# Altium PCB DryBox.PcbDoc
Units mm, origin at the board's own origin, x right, y up, seen from the top; angles counter-clockwise.
Board outline 48.4 x 55.54 mm, 2 copper layers (Top Layer, Bottom Layer); 57 components, 30 nets, 186 pads, 40 vias.
Unrouted connection lines stored in the file: 10.
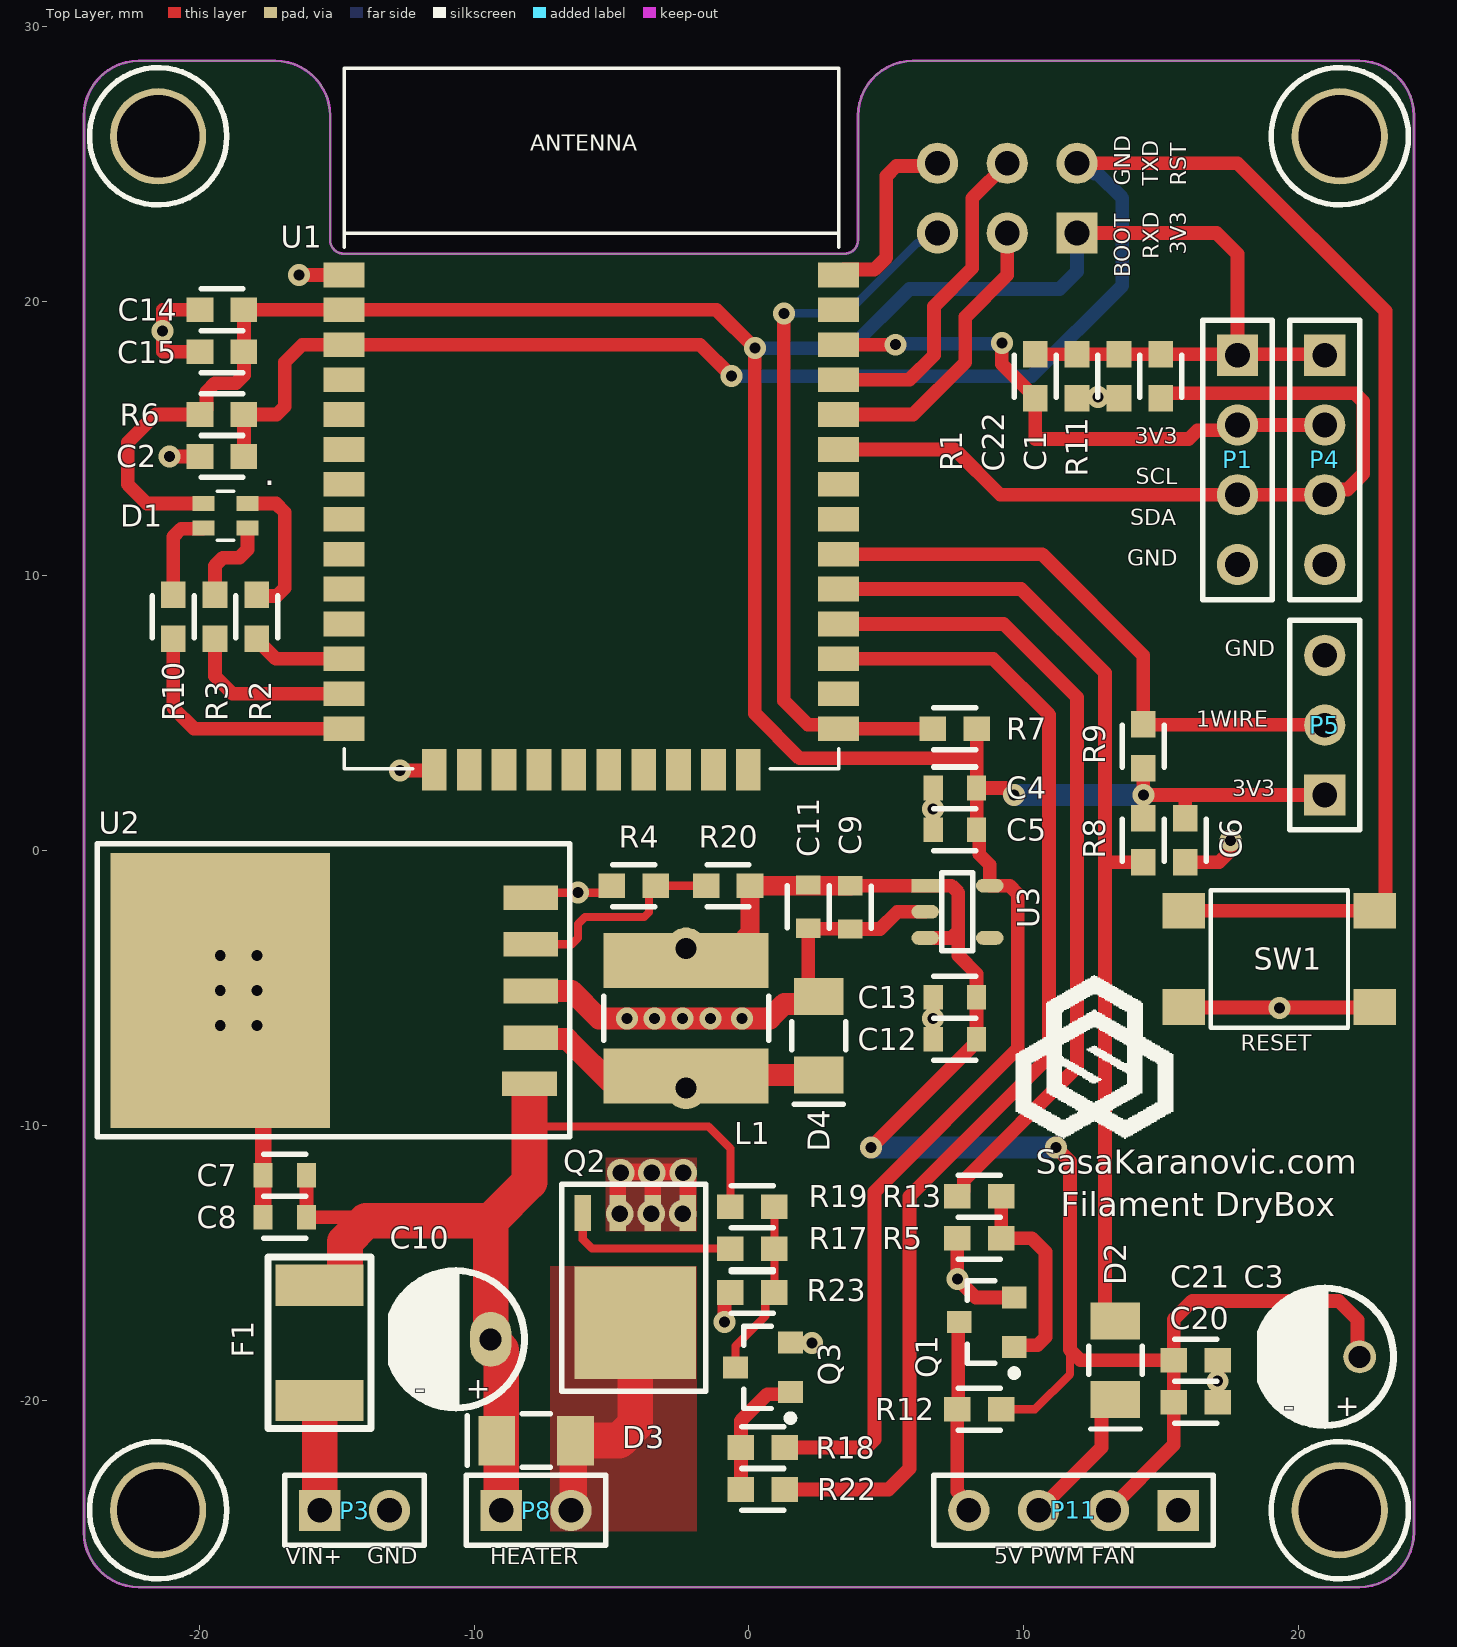
[diagram p0: Top Layer view]
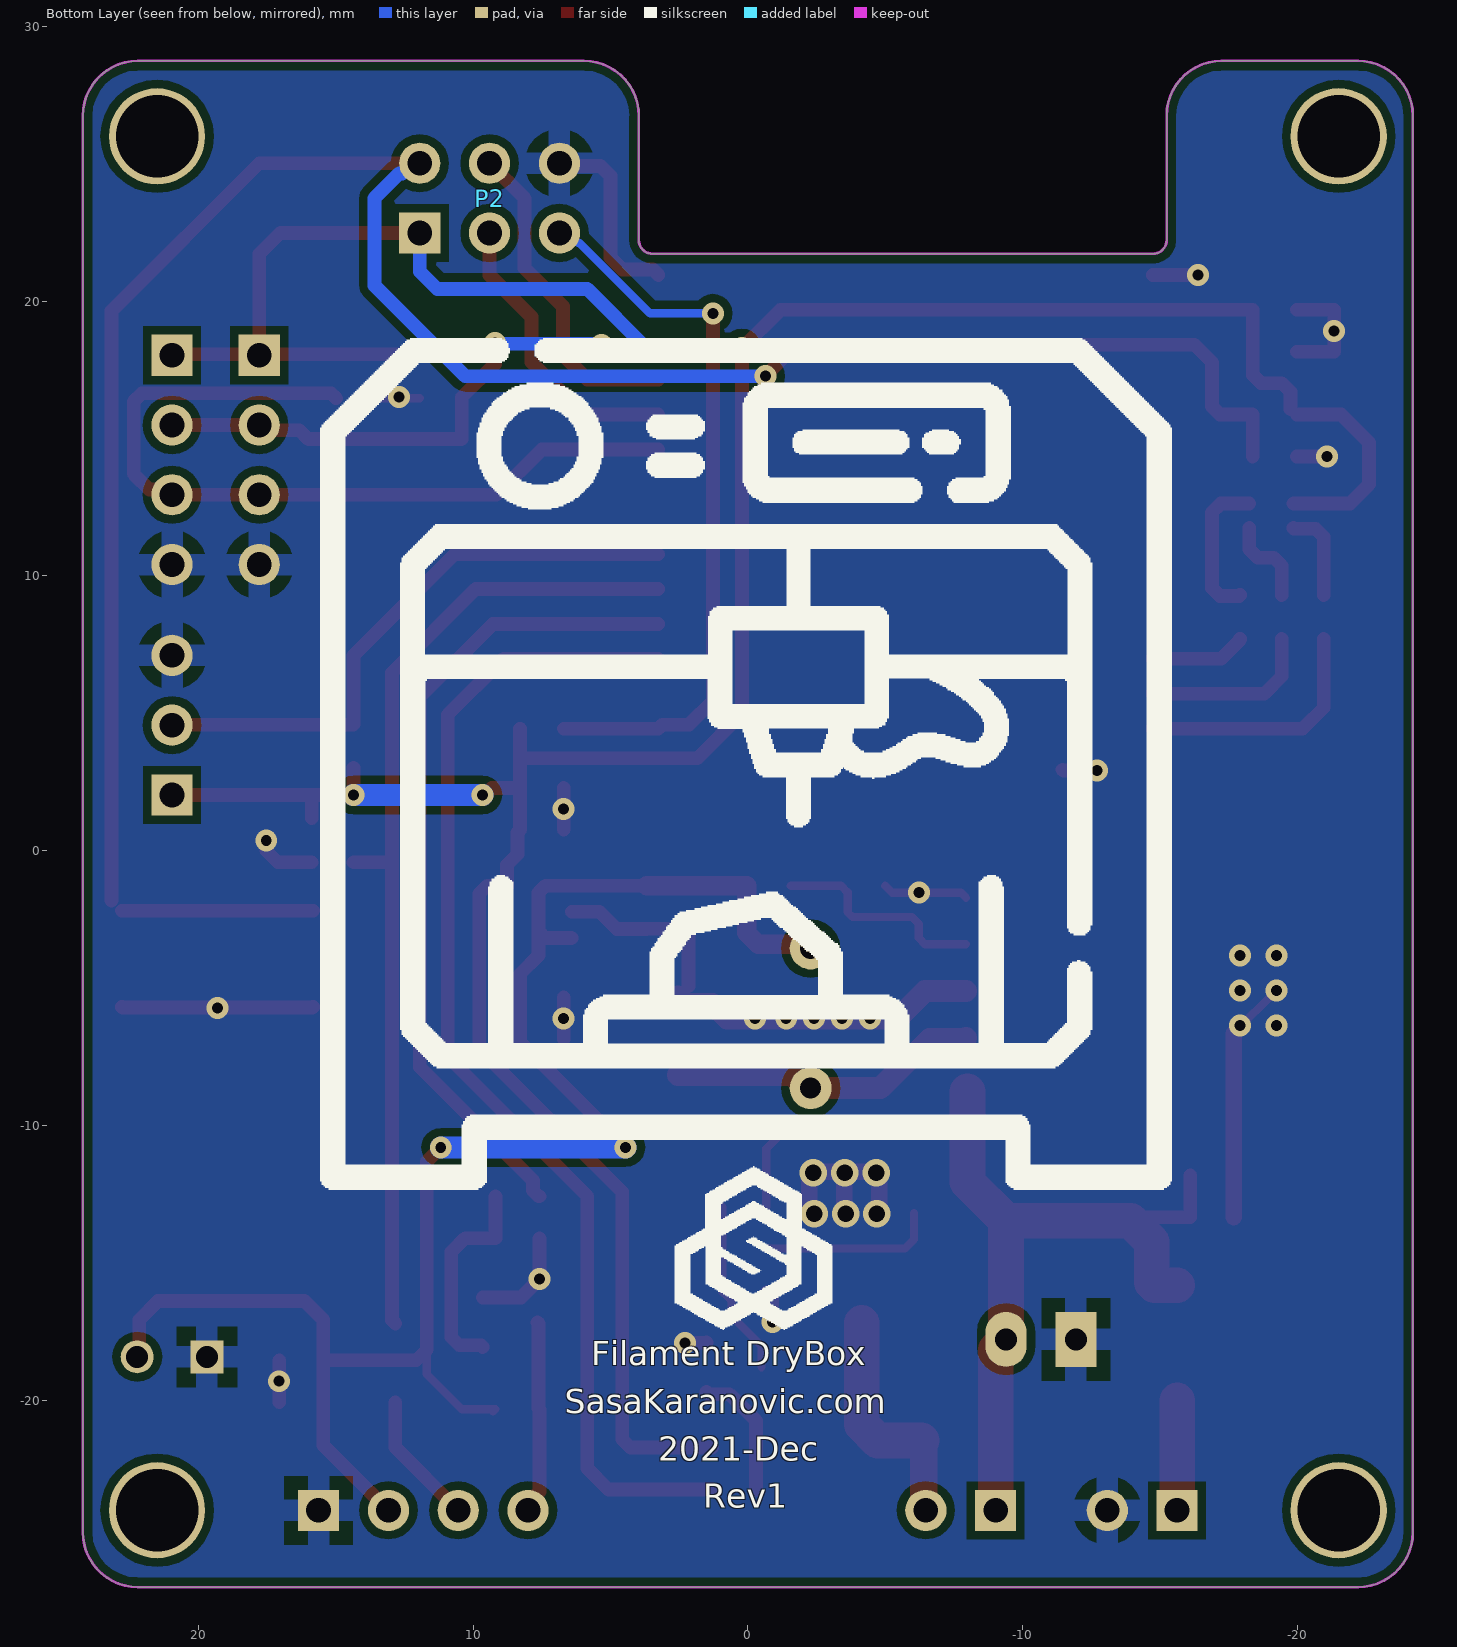
[diagram p1: Bottom Layer view, seen from below]
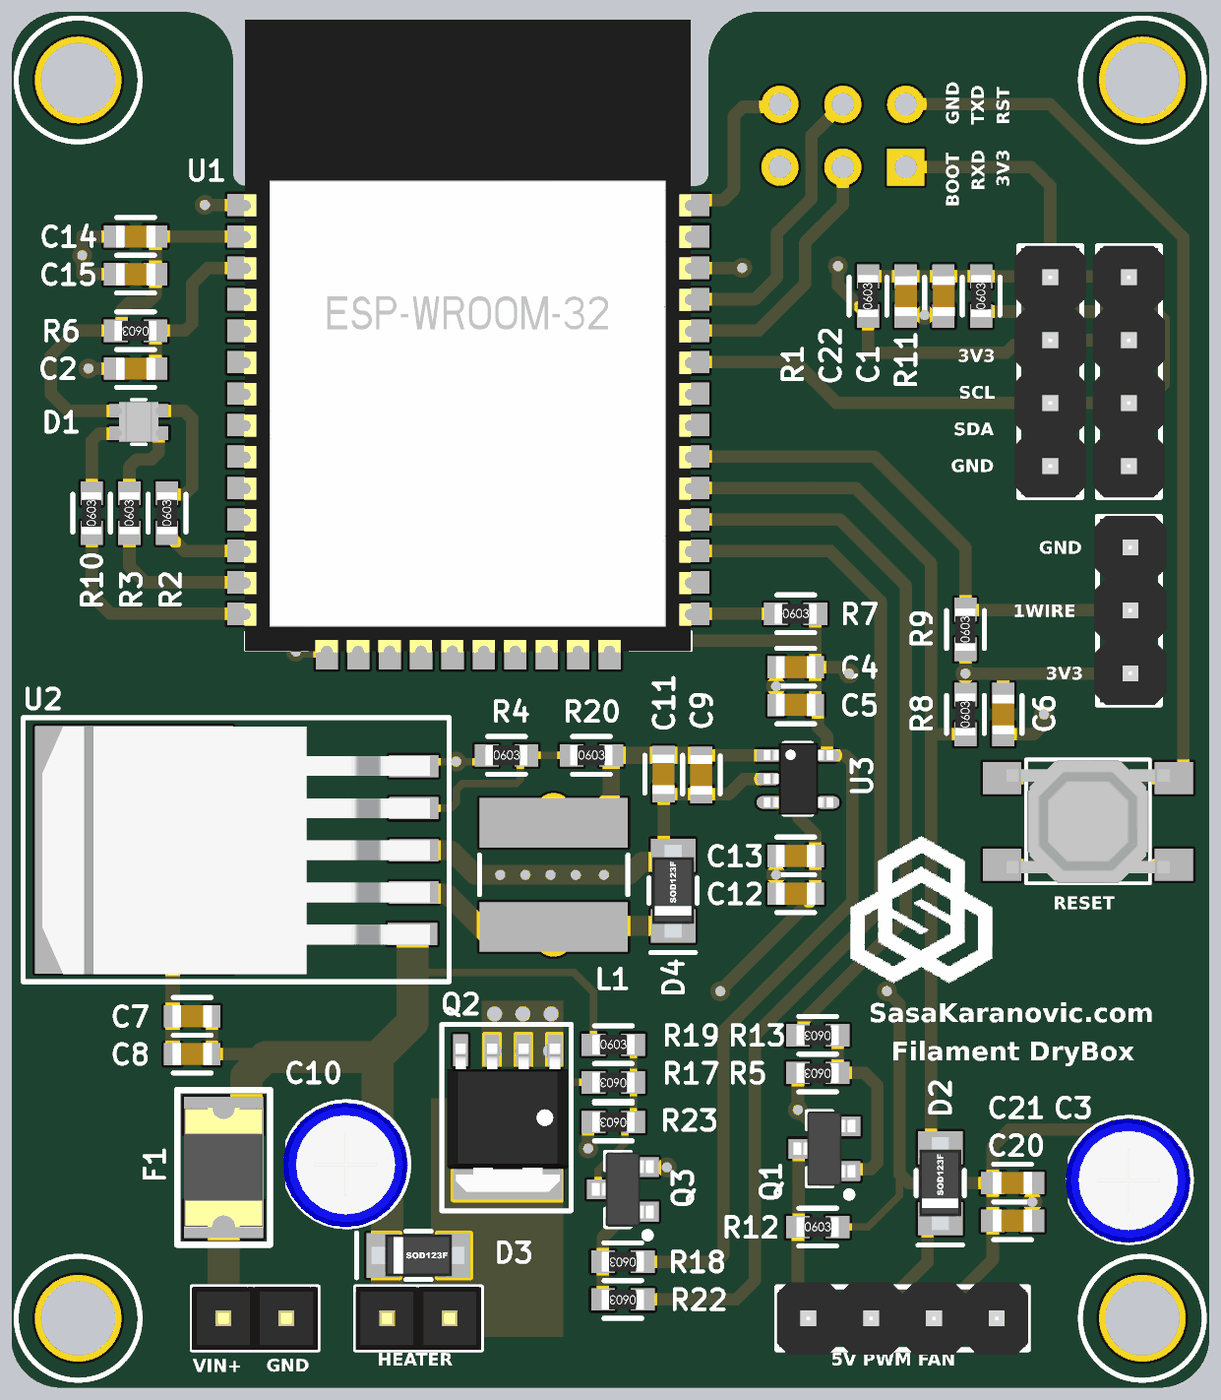
[diagram p2: 3D render of the assembled board from above, using the file's embedded part models]

## Layer stack, top to bottom
Top Solder: solder mask 0.0102, Solder Resist, Dk 3.5
Top Layer: signal copper 0.0356
Dielectric 1: dielectric 0.32, FR-4, Dk 4.8
Bottom Layer: signal copper 0.0356
Bottom Solder: solder mask 0.0102, Solder Resist, Dk 3.5

## Board outline
-24.2,-24.797 ccw(c-22.2,-24.797) -22.2,-26.797 22.2,-26.797 ccw(c22.2,-24.797) 24.2,-24.797 24.2,26.746 ccw(c22.2,26.746) 22.2,28.746 5.969,28.746 ccw(c5.969,26.746) 3.969,26.746 3.969,22.225 cw(c3.469,22.225) 3.469,21.725 -14.74,21.725 cw(c-14.74,22.225) -15.24,22.225 -15.24,26.746 ccw(c-17.24,26.746) -17.24,28.746 -22.2,28.746 ccw(c-22.2,26.746) -24.2,26.746

## Design rules (kind name [scope] priority, off if disabled: settings)
Clearance Clearance_1 [InNamedPolygon('GND_L02_P000')] p1: gap=0.3 ignorepadtopadclearanceinfootprint=FALSE
Clearance [All] p2: gap=0.152 ignorepadtopadclearanceinfootprint=FALSE
HoleSize [All] p1: absolutevalues=TRUE maxlimit=55 minlimit=0.4 maxpercent=80.000 minpercent=20.000
MinimumSolderMaskSliver [All] p1 off: minsoldermaskwidth=0.254
PolygonConnect PolygonConnect_2 [All vs IsNamedPolygon('GND_L01_P002')] p1: connectstyle=Direct reliefconductorwidth=0.254 reliefentries=4 polygonreliefangle="90 Angle" airgapwidth=0.254
PolygonConnect PolygonConnect_1 [All vs IsNamedPolygon('NETD3_A_L01_P001')] p2: connectstyle=Direct reliefconductorwidth=0.254 reliefentries=4 polygonreliefangle="90 Angle" airgapwidth=0.254
PolygonConnect [All] p3: thpad.connectstyle=Relief thpad.reliefconductorwidth=0.8 thpad.reliefentries=4 thpad.polygonreliefangle="90 Angle" thpad.airgapwidth=0.5 smdpad.connectstyle=Relief smdpad.reliefconductorwidth=0.5 smdpad.reliefentries=4 smdpad.polygonreliefangle="90 Angle" smdpad.airgapwidth=0.3 via.connectstyle=Direct via.reliefconductorwidth=0.254 via.reliefentries=4 via.polygonreliefangle="90 Angle" via.airgapwidth=0.254
RoutingVias [All] p1: holewidth=0.4 width=0.8 viastyle="Through Hole" minholewidth=0.4 minwidth=0.6 maxholewidth=50 maxwidth=100
SilkToSilkClearance [All] p1 off: silktosilkclearance=0.254
SilkToSolderMaskClearance [IsPad] p1 off: minsilkscreentomaskgap=0.254 clearancetoexposedcopper=TRUE
SolderMaskExpansion [All] p1: expansion=0.102 istentingtop=FALSE
Width [All] p1: maxlimit=50 minlimit=0.15 preferedwidth=0.5
26 further rules are at their usual default settings.

## Components (designator, comment, footprint, x,y, rotation, side; value= is the part's Value field where it differs from the comment)
C1 "Cap" "0603 - CAP HS" 13.462,17.272 r270 top value=10uF
C2 "Cap" "0603 - CAP HS" -19.177,14.351 r180 top value=100nF
C3 "25V" "Electrolytic Cap 2.54mm"#1 20.955,-18.415 r180 top value=100uF
C4 "Cap" "0603 - CAP" 7.493,2.286 r0 top value=100nF
C5 "Cap" "0603 - CAP" 7.493,0.762 r0 top value=1uF
C6 "Cap" "0603 - CAP HS" 15.875,0.381 r270 top value=10uF
C7 "Cap" "0603 - CAP" -16.891,-11.811 r0 top value=1uF
C8 "Cap" "0603 - CAP" -16.891,-13.335 r0 top value=100nF
C9 "Cap" "0603 - CAP" 3.683,-2.06 r90 top value=100nF
C10 "25V" "Electrolytic Cap 2.54mm"#2 -10.668,-17.78 r180 top value=100uF
C11 "Cap" "0603 - CAP" 2.159,-2.032 r90 top value=100nF
C12 "Cap" "0603 - CAP" 7.493,-6.858 r0 top value=1uF
C13 "Cap" "0603 - CAP" 7.493,-5.334 r0 top value=100nF
C14 "Cap" "0603 - CAP HS" -19.177,19.685 r180 top value=100nF
C15 "Cap" "0603 - CAP HS" -19.177,18.161 r180 top value=10uF
C20 "Cap" "0603 - CAP HS" 16.256,-20.066 r0 top value=1uF
C21 "Cap" "0603 - CAP HS" 16.256,-18.542 r0 top value=100nF
C22 "Cap" "0603 - CAP HS" 11.938,17.272 r270 top value=10uF
D1 "RGB LED" "RGB LED - 0606 (1616 Metric)" -19.05,12.192 r180 top
D2 "Diode Schotky" SOD123F 13.335,-18.542 r270 top
D3 "Diode Schotky" SOD123F -7.747,-21.463 r180 top
D4 "1N582" SOD123F 2.54,-6.731 r270 top
F1 "Fuse Thermal" 1812F -15.621,-17.907 r270 top
L1 "Inductor" IND_TH_SMD -2.286,-6.096 r90 top value=100uH
P1 "Sensor #2" "Header 4x1" 17.78,18.034 r270 top
P2 "ESP32 Program" HDR2X3 11.938,22.479 r180 bottom
P3 "Power In" "Header 2x1" -15.621,-24.003 r0 top
P4 "Sensor #1" "Header 4x1" 20.955,18.034 r270 top
P5 "Heater Temp Sens" "Header 3x1" 20.955,2.032 r90 top
P8 "Heater" "Header 2x1" -9.017,-24.003 r0 top
P11 "Header 4" "Header 4x1" 15.621,-24.003 r180 top
Q1 "DMN62D0U-13" SOT90P240X100-3N 8.652,-17.156 r180 top
Q2 "PSMN9R1-30YL" LFPAK-8 -4.191,-15.24 r270 top
Q3 "DMN62D0U-13" SOT90P240X100-3N 0.508,-18.796 r180 top
R1 "Res" "0603 - HS" 10.414,17.272 r90 top value=2K2
R2 "Res" "0603 - HS" -17.907,8.509 r90 top value=220R
R3 "Res" "0603 - HS" -19.431,8.509 r90 top value=220R
R4 "Res" "0603 - HS" -4.191,-1.27 r0 top value=DNP
R5 "Res" "0603 - HS" 8.382,-14.097 r180 top value=10K
R6 "Res" "0603 - HS" -19.177,15.875 r180 top value=4K7
R7 "Res" "0603 - HS" 7.493,4.445 r0 top value=4K7
R8 "Res" "0603 - HS" 14.351,0.381 r90 top value=4K7
R9 "Res" "0603 - HS" 14.351,3.81 r90 top value=4K7
R10 "Res" "0603 - HS" -20.955,8.509 r90 top value=220R
R11 "Res" "0603 - HS" 14.986,17.272 r90 top value=2K2
R12 "Res" "0603 - HS" 8.382,-20.32 r0 top value=4K7
R13 "Res" "0603 - HS" 8.382,-12.573 r180 top value=100R
R17 "Res" "0603 - HS" 0.127,-14.478 r180 top value=100R
R18 "Res" "0603 - HS" 0.508,-21.717 r180 top value=10K
R19 "Res" "0603 - HS" 0.127,-12.954 r0 top value=1K
R20 "Res" "0603 - HS" -0.762,-1.27 r0 top value=0R
R22 "Res" "0603 - HS" 0.508,-23.241 r180 top value=100R
R23 "Res" "0603 - HS" 0.127,-16.075 r180 top value=10K
SW1 "SWITCH TACTILE SPST-NO 0.05A 12V" 5MM_5MM_SWITCH_SMT 19.304,-3.937 r0 top
U1 "ESP32 Module" ESP32-WROOM-32 -14.732,20.955 r0 top locked
U2 "LM2576-xx" TO263-5 -15.24,-5.08 r90 top
U3 "MIC5365-3.3YD5-TR" "SOT-23-5 - duplicate" 6.413,-1.27 r0 top

## Footprints (in the part's own frame and the unit in brackets; to place one, negate y for a bottom-side part, rotate by r counter-clockwise, add the part's x,y. Pads: shape width x height; smd on the part's side, far side on the other; paste and mask are expansions set on the pad)
5MM_5MM_SWITCH_SMT [mm] "5mm Tact Switch"
  rect 1.55x1.3 smd: 1(-3.475,1.75) 2(3.475,1.75) 3(-3.475,-1.75) 4(3.475,-1.75)
  silkscreen extent -2.5,-2.5 2.5,2.5, body extent -3.3,-2.5 3.3,2.5, height 1.52
"0603 - CAP" [mm]
  rect 0.7x0.9 smd: 1(-0.79,0) 2(0.79,0)
  silkscreen extent -0.76,-0.76 0.76,0.76, body extent -0.8,-0.44 0.8,0.46, height 0.8
"0603 - CAP HS" [mm]
  rect 0.965x0.9 smd: 1(-0.8,0) 2(0.8,0)
  silkscreen extent -0.76,-0.76 0.76,0.76, body extent -0.8,-0.44 0.8,0.46, height 0.8
"0603 - HS" [mm]
  rect 0.965x0.9 smd: 1(-0.8,0) 2(0.8,0)
  silkscreen extent -0.76,-0.76 0.76,0.76, body extent -0.85,-0.4 0.85,0.4, height 0.56
1812F [mm] "1812 Fuse Footprint"
  rect 1.5x3.2 smd: 1(-2.1,0) 2(2.1,0)
  silkscreen extent -3.13,-1.88 3.13,1.88, body extent -2.41,-1.61 2.41,1.61, height 1.32
"Electrolytic Cap 2.54mm"#1 [mm] "Elektrolitski kondenzator, razmak 2.54mm"
  round 1.2 hole 0.8: 1(-1.27,0)
  rect 1.2x1.2 hole 0.8: 2(1.27,0)
  silkscreen extent -2.5,-2.5 2.33,2.5, body extent -2.5,-2.5 2.55,2.55, height 3.07
"Electrolytic Cap 2.54mm"#2 [mm] "Elektrolitski kondenzator, razmak 2.54mm"
  oval 1.5x2 hole 0.8: 1(-1.27,0)
  rect 1.5x2 hole 0.8: 2(1.27,0)
  silkscreen extent -2.5,-2.5 2.33,2.5, body extent -2.5,-2.5 2.55,2.55, height 3.07
ESP32-WROOM-32 [mm]
  rect 1.5x0.9 smd: 1(0,0) 1(0,0) 2(0,-1.27) 3(0,-2.54) 4(0,-3.81) 5(0,-5.08) 6(0,-6.35) 7(0,-7.62) 8(0,-8.89) 9(0,-10.16) 10(0,-11.43) 11(0,-12.7) 12(0,-13.97) 13(0,-15.24) 14(0,-16.51) 25(17.99,-16.51) 25(17.99,-16.51) 26(17.99,-15.24) 27(17.99,-13.97) 28(17.99,-12.7) 29(17.99,-11.43) 30(17.99,-10.16) 31(17.99,-8.89) 32(17.99,-7.62) 33(17.99,-6.35) 34(17.99,-5.08) 35(17.99,-3.81) 36(17.99,-2.54) 37(17.99,-1.27) 38(17.99,0)
  rect 0.9x1.5 smd: 15(3.28,-18.01) 15(3.28,-18.01) 16(4.55,-18.01) 17(5.82,-18.01) 18(7.09,-18.01) 19(8.36,-18.01) 20(9.63,-18.01) 21(10.9,-18.01) 22(12.17,-18.01) 23(13.44,-18.01) 24(14.71,-18.01)
  silkscreen extent 0,-17.97 18,7.53, body extent -0.06,-18.07 18.01,7.47, height 3.1
HDR2X3 [mm] "Connector; Header; 3x2 Position"
  rect 1.5x1.5 hole 0.9: 1(0,0)
  round 1.5 hole 0.9: 2(0,2.54) 3(2.54,0) 4(2.54,2.54) 5(5.08,0) 6(5.08,2.54)
"Header 2x1" [mm] "Jumper 2x2,54mm"
  rect 1.5x1.5 hole 0.9: 1(0,0)
  round 1.5 hole 0.9: 2(2.54,0)
  silkscreen extent -1.27,-1.27 3.81,1.27, body extent -1.28,-1.27 3.8,1.27, height 8.49
"Header 3x1" [mm] "Connector; Header; 3 Position"
  rect 1.5x1.5 hole 0.9: 1(0,0)
  round 1.5 hole 0.9: 2(2.54,0) 3(5.08,0)
  silkscreen extent -1.27,-1.27 6.35,1.27, body extent -1.26,-1.52 6.36,1.4, height 3.18
"Header 4x1" [mm] "Connector; Header; 4 Position"
  rect 1.5x1.5 hole 0.9: 1(0,0)
  round 1.5 hole 0.9: 2(2.54,0) 3(5.08,0) 4(7.62,0)
  silkscreen extent -1.27,-1.27 8.89,1.27, body extent -1.27,-1.46 8.89,1.46, height 8.51
IND_TH_SMD [mm]
  round 1.524 hole 0.762 mask+0.102: 1(-2.54,0) 2(2.54,0)
  rect 2x6 smd: 1(-2.1,0) 2(2.1,0)
  silkscreen extent -0.8,-3 0.8,3
LFPAK-8 [mm] "LFPAK Power Pack"
  rect 4.1x4.41 smd: D(1.93,0.051)
  rect 1.3x0.6 smd: G(-2.057,-1.854) S(-2.057,1.956) S(-2.057,-0.584) S(-2.057,0.686)
  silkscreen extent -3.1,-2.62 4.42,2.62, body extent -2.34,-2.4 3.66,2.5, height 1.1
"RGB LED - 0606 (1616 Metric)" [mm] "4-SMD - 1.60mm L x 1.60mm W"
  rect 0.8x0.55 smd: 1(-0.8,-0.45) 2(-0.8,0.45) 3(0.8,0.45) 4(0.8,-0.45)
  silkscreen extent -0.3,-0.9 0.3,0.9, body extent -0.8,-0.8 0.8,0.8, height 0.46
SOD123F [mm]
  rect 1.34x1.8 smd: A(-1.43,0) K(1.43,0)
  silkscreen extent -0.51,-0.97 2.5,0.97, body extent -1.85,-0.85 1.9,0.85, height 1.2
SOT90P240X100-3N [mm] "SOT23, 3-Leads, Body 2.90x2.40mm, Pitch 0.90mm, IPC Medium Density"
  rect 0.9x0.8 smd: 1(-1,0.9) 2(-1,-0.9) 3(1,0)
  silkscreen extent -1.13,-1.5 0.7,1.97, body extent -1.25,-1.5 1.25,1.5, height 1
"SOT-23-5 - duplicate" [mm]
  rect 1x0.5 smd: 1(0,0)
  oval 1x0.5 smd: 2(0,-0.95) 3(0,-1.9) 4(2.35,-1.9) 5(2.35,0)
  silkscreen extent 0.61,-2.38 1.73,0.48, body extent -0.21,-2.4 2.59,0.5, height 1.45
TO263-5 [mm] "TO263-5 SMT package"
  rect 0.9x2 smd: 1(-3.4,-7.25) 2(-1.725,-7.3) 3(-0.025,-7.3) 4(1.675,-7.3) 5(3.375,-7.3)
  rect 10x8 smd: 3(0,4)
  silkscreen extent -5.34,-8.72 5.34,8.47, body extent -5.02,-7.96 4.98,7.71, height 4.78

## Part data
C1 C6 C15 C22: "Capacitor", Distributor Part Number=1276-1870-1-ND, Manufacturer="Samsung Electro-Mechanics", Manufacturer Part Number=CL10A106MO8NQNC, Distributor=DigiKey
C2 C4 C8 C9 C11 C13 C14 C21: "Capacitor", Distributor Part Number=1276-1009-1-ND, Manufacturer="Samsung Electro-Mechanics", Manufacturer Part Number=CL10B103KB8NNNC, Distributor=DigiKey
C3 C10: library part "Cap Electrolytic", "Polarized Capacitor (Axial)", Distributor Part Number=732-9599-1-ND, Manufacturer="Würth Elektronik", Manufacturer Part Number=860160674021, Distributor=DigiKey
C5 C7 C12 C20: "Capacitor", Distributor Part Number=1276-1860-1-ND, Manufacturer="Samsung Electro-Mechanics", Manufacturer Part Number=CL10A105KB8NNNC, Distributor=DigiKey
D1: library part EAST1616RGBB2, "Red, Green, Blue (RGB) - LED Indication - Discrete 1.9V Red, 2.8V Green, 2.8V Blue 0606 (1616 Metric)", Distributor Part Number=1080-1551-1-ND, Manufacturer="Everlight Electronics Co Ltd", Distributor=DigiKey, Manufacturer Part Number=EAST1616RGBB2
D2 D3: Distributor Part Number=1727-3848-1-ND, Manufacturer="Nexperia USA Inc.", Manufacturer Part Number=PMEG6010CEH,115, Distributor=DigiKey
D4: library part "Diode Schotky", Distributor Part Number=1727-3848-1-ND, Manufacturer="Nexperia USA Inc.", Manufacturer Part Number=PMEG6010CEH,115, Distributor=DigiKey
F1: "Thermal Fuse", Distributor Part Number=SF-1206SP200-2CT-ND, Manufacturer="Bourns Inc.", Manufacturer Part Number=SF-1206SP200-2, Distributor=DigiKey
L1: Distributor Part Number=445-180842-1-ND, Manufacturer="TDK Corporation", Manufacturer Part Number=VLS6045AF-101M, Distributor=DigiKey
P1 P4: library part "Header 4", "Header, 4-Pin"
P2: library part "Header 3X2", "Header, 3-Pin, Dual row"
P3 P8: library part "Header 2", "Header, 2-Pin"
P5: library part "Header 3", "Header, 3-Pin"
P11: "Header, 4-Pin"
Q1 Q3: "MOSFET N-CH 60V 0.38A", Distributor Part Number=DMN62D0U-13DICT-ND, Manufacturer="Diodes Incorporated", Distributor=DigiKey, Manufacturer Part Number=DMN62D0U-13
Q2: "MOSFET N-CH 30V 37A LFPAK", Manufacturer="Nexperia USA Inc.", Manufacturer Part Number=PSMN011-30YLC,115, Distributor=DigiKey
R1 R11: "Resistor", Distributor Part Number=RMCF0603JT2K20CT-ND, Manufacturer="Stackpole Electronics Inc", Manufacturer Part Number=RMCF0603JT2K20, Distributor=DigiKey
R2 R3 R10: "Resistor", Distributor Part Number=RMCF0603FT220RCT-ND, Manufacturer="Stackpole Electronics Inc", Manufacturer Part Number=RMCF0603FT220R, Distributor=DigiKey
R4: "Resistor", Distributor=DigiKey
R5 R18 R23: "Resistor", Distributor Part Number=RMCF0603JT10K0CT-ND, Manufacturer="Stackpole Electronics Inc", Manufacturer Part Number=RMCF0603JT10K0, Distributor=DigiKey
R6 R7 R8 R9 R12: "Resistor", Distributor Part Number=RMCF0603FT4K70CT-ND, Manufacturer="Stackpole Electronics Inc", Manufacturer Part Number=RMCF0603FT4K70, Distributor=DigiKey
R13 R17 R22: "Resistor", Distributor Part Number=RMCF0603FT100RCT-ND, Manufacturer="Stackpole Electronics Inc", Manufacturer Part Number=RMCF0603FT100R, Distributor=DigiKey
R19: "Resistor", Distributor Part Number=RNCS0603BKE1K00CT-ND, Manufacturer="Stackpole Electronics Inc", Manufacturer Part Number=RNCS0603BKE1K00, Distributor=DigiKey
R20: "Resistor", Distributor Part Number=RMCF0603ZT0R00CT-ND, Manufacturer="Stackpole Electronics Inc", Manufacturer Part Number=RMCF0603ZT0R00, Distributor=DigiKey
SW1: library part "PTS645SL50SMTR92 LFS", Distributor Part Number=CKN9088CT-ND, Manufacturer=C&K, Distributor=DigiKey, Manufacturer Part Number="PTS645SL50SMTR92 LFS"
U1: library part ESP32_Module, Manufacturer="Espressif Systems", Manufacturer Part Number="ESP32-WROOM-32D (4MB HIGH TEMP)"
U2: "Switching mode regulator [ 3v3, 5v, 12v and ADJ ]", Distributor Part Number=LM2576S-5.0/NOPB-ND, Manufacturer="Texas Instruments", Manufacturer Part Number=LM2576S-5.0/NOPB, Distributor=DigiKey
U3: library part MIC5365-1.8YD5-TR, "High-Performance Single 1.8V@150mA LDO", Distributor Part Number=576-4085-1-ND, Manufacturer="Microchip Technology", Distributor=DigiKey, Manufacturer Part Number=MIC5365-3.3YD5-TR

## Free pads (board coordinates)
  round 3.5 hole 3 unplated: ""(-21.5,-24) ""(-21.5,26) ""(21.5,-24) ""(21.5,26)

## Via types
v1: diameter 0.8, hole 0.4, Top Layer to Bottom Layer, tented both sides, 34 vias
v2: diameter 1, hole 0.6, Top Layer to Bottom Layer, tented both sides, 6 vias

## Nets (pads, with @x,y where several pads share a name; then routed paths per layer and width w, separated by ;. In a path a pad name is that pad's centre, name@x,y a point inside that pad or via, vN(x,y) a via of type N, cw(c..) or ccw(c..) an arc to the next point about the centre after c; other vN are vias at no path point)
3V3: C1.1 C4.2 C5.2 C6.1 C14.1 C15.1 C22.1 D1.4 P1.1 P2.1 P4.1 P5.1 R1.2 R6.2 R7.2 R8.2 R9.1 R11.2 R18.1 U1.2 U3.5 | length 135.2
  Top Layer w0.5: R6.2 -21.59,15.875 -22.606,14.859 -22.606,13.335 -21.913,12.642 D1.4 ; R6.2@-19.744,16.075 -19.744,16.705 -19.431,17.018 -18.67,17.018 -18.377,17.311 C15.1 C14.1 -1.183,19.685 v1(0.214,18.288) 0.214,4.993 1.844,3.363 8.288,3.363 ; R18.1 4.279,-21.717 4.572,-21.424 4.572,-12.412 9.779,-7.205 9.779,-1.563 9.486,-1.27 U3.5 8.763,-0.508 8.383,-0.128 8.383,0.662 C5.2 8.288,0.767 C4.2@8.288,2.286 ; C4.2 C4.2@8.288,2.286 ; R7.2 8.288,4.44 8.288,3.363 ; v1(9.652,2.032) 9.571,2.032 9.317,2.286 C4.2@8.288,2.286 ; R1.2 C22.1 C1.1 R11.2 P1.1@17.78,18.072 ; P2.1 17.018,22.479 17.78,21.717 P1.1@17.78,18.072 ; R9.1 v1(14.351,2.032) 15.875,2.032 ; C6.1 15.875,2.032 ; P1.1 P1.1@17.78,18.072 ; P5.1 15.875,2.032 ; P4.1 20.917,18.072 P1.1@17.78,18.072 ; C4.2@8.288,2.286 8.288,3.363
  Bottom Layer w0.5: v1(0.214,18.288) 3.683,18.288 5.842,20.447 11.303,20.447 11.938,21.082 P2.1
  Bottom Layer w0.8: v1(9.652,2.032) v1(14.351,2.032)
5V: C3.1 C9.2 C11.2 C12.2 C13.2 C20.1 C21.1 L1.2 P11.2 R12.2 R20.2 U3.1 U3.3 | length 63.3
  Top Layer w0.3: R12.2@9.271,-20.409 R12.2 10.414,-20.32 11.684,-19.05 11.684,-18.161
  Top Layer w0.5: C9.2 U3.1 7.366,-1.27 7.62,-1.524 7.62,-2.921 ; v1@4.388,-10.853 8.283,-6.958 C12.2 C13.2 8.283,-4.473 7.62,-3.81 7.62,-2.921 ; U3.3 7.371,-3.17 7.62,-2.921 ; v1(11.176,-10.795) 11.684,-11.303 11.684,-18.161 12.065,-18.542 C21.1 ; P11.2 15.456,-21.628 C20.1 C21.1 ; C3.1 22.145,-18.335 22.145,-17.065 21.463,-16.383 16.129,-16.383 15.456,-17.056 C21.1
  Top Layer w0.7: L1.2@-2.286,-3.556 -2.128,-3.398 -0.372,-3.398 0.038,-2.988 R20.2 C9.2
  Bottom Layer w0.8: v1(4.445,-10.795) v1(11.176,-10.795)
12V: C7.2 C8.2 C10.1 D3.K F1.1 P8.1 R19.1 U2.1 | length 37.6
  Top Layer w0.3: -7.99,-10.033 -1.473,-10.033 -0.673,-10.833 R19.1
  Top Layer w0.5: C7.2 C8.2 -14.062,-13.335 -13.935,-13.462
  Top Layer w1.3: F1.1 -14.797,-15.807 -14.697,-15.707 -14.697,-14.224 -13.935,-13.462 -9.398,-13.462 ; P8.1 -9.017,-21.463 -9.017,-18.161 C10.1 -9.398,-13.462 ; U2.1@-7.99,-8.763 -7.99,-10.033 -7.99,-12.054 -9.398,-13.462
BOOT: P2.5 R7.1 U1.25 | length 26.7
  Top Layer w0.5: v1(1.27,19.558) 1.27,5.461 2.142,4.589 3.114,4.589 3.258,4.445 R7.1
  Bottom Layer w0.3: v1(1.27,19.558) 3.556,19.558 6.119,22.121 6.175,22.121 6.533,22.479 P2.5
CTRL_HEATER: R22.1 U1.27 | length 42.9
  Top Layer w0.5: R22.1 5.08,-23.241 5.842,-22.479 5.842,-12.573 10.922,-7.493 10.922,4.953 8.89,6.985 U1.27
FAN_PWM: R13.2 U1.28 | length 29.8
  Top Layer w0.5: U1.28 9.271,8.255 11.938,5.588 11.938,-7.874 7.815,-11.997 7.815,-12.373 7.614,-12.573 R13.2
FAN_PWM_CON: P11.4 Q1.3 R12.1 | length 7
  Top Layer w0.5: Q1.3 7.617,-17.191 7.617,-20.285 R12.1 7.582,-23.313 8.001,-23.732 P11.4
FAN_TACHO: D2.A R8.1 U1.29 | length 36.1
  Top Layer w0.5: U1.29 9.906,9.525 12.954,6.477 12.954,-0.381 ; D2.A@12.827,-17.206 12.954,-17.079 12.954,-0.381 ; R8.1 12.992,-0.419 12.954,-0.381
FAN_TACHO_CON: D2.K P11.3 | length 4.9
  Top Layer w0.5: P11.3 12.827,-21.717 D2.K@12.827,-20.066
GND: C1.2 C2.2 C3.2 C4.1 C5.1 C6.2 C7.1 C8.1 C9.1 C10.2 C11.1 C12.1 C13.1 C14.2 C15.2 C20.2 C21.2 C22.2 D4.A P1.4 P2.6 P3.2 P4.4 P5.3 P11.1 Q1.2 Q2.S Q3.2 R4.1 R5.2 R23.2 SW1.3 SW1.4 U1.1 U1.15 U1.38 U2.3 U2.5 U3.2 | length 73.5
  Top Layer w0.3: v1(-19.24,-5.08) U2.3@-17.681,-6.639 ; U2.5 -7.759,-1.524 -5.245,-1.524 R4.1 ; v2@-3.556,-11.684 v2@-3.505,-11.735 ; D4.A@2.159,-4.92 D4.A ; C11.1 C11.1@2.173,-2.836 ; C9.1@3.669,-2.836 C9.1 ; C22.2 C1.2
  Top Layer w0.5: v1(-21.082,14.351) C2.2 ; C15.2 -21.336,18.161 -21.336,19.685 C14.2 ; v1(-16.383,20.955) U1.1@-14.732,20.955 ; v1(-12.7,2.921) -11.476,2.921 U1.15@-11.452,2.945 ; v1(-0.889,-17.145) -0.889,-16.275 -0.689,-16.075 R23.2 ; Q3.2 1.519,-17.907 v1(2.286,-17.907) ; D4.A@2.159,-4.92 C11.1 ; C11.1@2.173,-2.836 C9.1@3.669,-2.836 ; U1.38 3.458,21.155 4.564,21.155 4.999,21.59 4.999,24.557 5.358,24.916 6.755,24.916 P2.6 ; C9.1 4.77,-2.85 5.4,-2.22 U3.2 ; C12.1 C13.1 ; C5.1 C4.1 ; R5.2 v1(7.582,-15.583) 8.255,-16.256 Q1.2 ; SW1.3 15.843,-5.701 19.29,-5.701 v1(19.304,-5.715) 19.318,-5.701 22.765,-5.701 SW1.4 ; C6.2 17.107,-0.419 17.526,0 v1(17.526,0.381) ; C20.2 C21.2
  Top Layer w0.6: C8.1 C7.1 U2.3@-17.681,-6.639 ; Q2.S@-4.775,-13.183 -4.775,-11.887 -4.572,-11.684 -3.556,-11.684 -2.54,-11.684 -2.235,-11.989 Q2.S@-2.235,-13.183 ; Q2.S@-3.505,-13.183 v2@-3.505,-11.735
  Top Layer w0.8: U2.3@-7.94,-5.105 -6.452,-5.105 -5.461,-6.096 0.762,-6.096 1.287,-5.571 2.27,-5.571 D4.A
  other v1: 17.056,-19.304 -19.24,-6.35 -17.907,-6.35 -4.445,-6.096 -3.429,-6.096 -2.413,-6.096 -1.397,-6.096 -0.254,-6.096 6.703,-6.096 -17.907,-5.08 -19.24,-3.81 -17.907,-3.81 -6.223,-1.524 6.703,1.524 12.7,16.51 -21.336,18.923
  other v2: -4.699,-13.208 -3.556,-13.208 -2.413,-13.208 -4.674,-11.709 -3.531,-11.709 -2.388,-11.709
NetD1_1: D1.1 R2.2 | length 5.4
  Top Layer w0.5: D1.1 -17.214,12.642 -16.891,12.319 -16.891,9.564 -17.184,9.271 -17.869,9.271 R2.2
NetD1_2: D1.2 R3.2 | length 3.3
  Top Layer w0.5: R3.2 -19.431,10.375 -19.138,10.668 -18.543,10.668 -18.25,10.961 D1.2
NetD1_3: D1.3 R10.2 | length 3.4
  Top Layer w0.5: R10.2 -20.955,11.424 -20.662,11.717 -19.875,11.717 D1.3
NetD3_A: D3.A P8.2 Q2.D | length 8.6
  Top Layer w1: P8.2 -6.397,-23.923 D3.A@-6.397,-21.543
  Top Layer w1.3: D3.A -4.726,-21.463 -4.14,-20.877 Q2.D
NetD4_K: D4.K L1.1 U2.2 | length 11.4
  Top Layer w0.8: U2.2 -7.89,-6.855 -6.607,-6.855 -4.826,-8.636 -2.286,-8.636 -2.09,-8.636 -1.615,-8.161 D4.K
NetF1_2: F1.2 P3.1 | length 4
  Top Layer w1.3: P3.1 F1.2
NetQ1_1: Q1.1 R5.1 R13.1 | length 7.7
  Top Layer w0.5: R13.1 R5.1 10.287,-14.097 10.795,-14.605 10.795,-17.703 10.502,-17.995 9.713,-17.995 Q1.1
NetQ2_G: Q2.G R17.2 | length 6.5
  Top Layer w0.3: Q2.G -6.045,-14.148 -5.715,-14.478 R17.2
NetQ3_1: Q3.1 R18.2 R22.2 | length 4.7
  Top Layer w0.5: R22.2 R18.2 -0.292,-20.739 0.674,-19.773 1.431,-19.773 Q3.1
NetQ3_3: Q3.3 R17.1 R19.2 R23.1 | length 6.4
  Top Layer w0.3: Q3.3 -0.492,-18.018 0.594,-16.932 0.594,-16.375 0.895,-16.075 R23.1 R17.1 R19.2
NetR2_1: R2.1 U1.12 | length 3.5
  Top Layer w0.5: R2.1 -17.907,7.676 -17.216,6.985 U1.12
NetR3_1: R3.1 U1.13 | length 6.3
  Top Layer w0.5: R3.1 -19.431,6.35 -18.796,5.715 U1.13
NetR4_2: R4.2 R20.1 U2.4 | length 8
  Top Layer w0.3: U2.4 -6.453,-3.405 -6.223,-3.175 -6.223,-2.667 -5.969,-2.413 -3.81,-2.413 -3.634,-2.237 -3.634,-1.513 R4.2 R20.1
NetR10_1: R10.1 U1.14 | length 9
  Top Layer w0.5: R10.1 -20.955,5.207 -20.193,4.445 U1.14
nRESET: C2.1 P2.2 R6.1 SW1.1 SW1.2 U1.3 | length 90.4
  Top Layer w0.5: C2.1 R6.1 -17.184,15.875 -16.891,16.168 -16.891,17.78 -16.256,18.415 U1.3 -1.778,18.415 v1(-0.635,17.272) ; SW1.1 SW1.2 ; SW1.2@23.16,-1.806 23.16,19.639 17.78,25.019 ; 17.78,25.019 P2.2 17.78,25.019
  Bottom Layer w0.5: v1(-0.635,17.272) 10.287,17.272 13.589,20.574 13.589,23.749 12.689,24.649 12.579,24.649 12.209,25.019 P2.2
OW_TEMP_HEATER: P5.2 R9.2 U1.30 | length 21.7
  Top Layer w0.5: U1.30 10.668,10.795 14.351,7.112 R9.2 14.37,4.591 20.936,4.591 P5.2
RXD: P2.3 U1.34 | length 10.7
  Top Layer w0.5: U1.34 5.969,15.875 7.874,17.78 7.874,19.431 9.398,20.955 P2.3
SCL: P1.2 P4.2 R1.1 U1.36 | length 20.7
  Top Layer w0.5: U1.36 v1(5.334,18.415) ; v1(9.201,18.485) 9.201,17.717 10.414,16.504 10.414,14.986 16.002,14.986 16.319,15.303 17.589,15.303 P1.2 P4.2
  Bottom Layer w0.5: v1(5.334,18.415) 5.369,18.45 9.167,18.45 v1(9.201,18.485)
SDA: P1.3 P4.3 R11.1 U1.33 | length 30.3
  Top Layer w0.5: U1.33 7.493,14.605 9.144,12.954 P1.3 P4.3 21.146,13.145 21.781,13.145 22.352,13.716 22.352,16.354 22.059,16.646 15.16,16.646 R11.1
TXD: P2.4 U1.35 | length 11.9
  Top Layer w0.5: U1.35 5.842,17.145 6.731,18.034 6.731,19.812 8.128,21.209 8.128,23.749 P2.4
pads on no net: U1.4 U1.5 U1.6 U1.7 U1.8 U1.9 U1.10 U1.11 U1.16 U1.17 U1.18 U1.19 U1.20 U1.21 U1.22 U1.23 U1.24 U1.26 U1.31 U1.32 U1.37 U3.4

## Polygon pours and split planes (outlines as drawn)
GND on Top Layer "GND_L01_P002" (solid, pour order 2): -5.207,-13.843 -1.905,-13.843 -1.905,-11.176 -5.207,-11.176
NetD3_A on Top Layer "NETD3_A_L01_P001" (solid, pour order 1): -7.239,-15.113 -7.239,-24.765 -1.905,-24.765 -1.905,-15.113
GND on Bottom Layer "GND_L02_P000" (solid, remove dead copper, pour order 0): -24.5,-27 ccw(c-22.5,-27) -22.5,-29 22.5,-29 ccw(c22.5,-27) 24.5,-27 24.5,27 ccw(c22.5,27) 22.5,29 5.969,29 ccw(c5.969,27) 3.969,27 3.969,22.225 cw(c3.469,22.225) 3.469,21.725 -14.74,21.725 cw(c-14.74,22.225) -15.24,22.225 -15.24,27 ccw(c-17.24,27) -17.24,29 -22.5,29 ccw(c-22.5,27) -24.5,27

## Keep-outs
Keep-Out Layer:
  the board outline again, w0.1

## Other copper
Top Layer:
  text ".Layer_Name" at 34.9,-28.379 h1
Bottom Layer:
  text ".Layer_Name" at 34.9,-30.456 h1

## Silkscreen, mask and mechanical layers (free items; w line width, h text height)
Top Overlay:
  drawing of 5 lines, arcs and shapes, not listed
  text "GND" at 14.085,24.201 h1 r90
  text "TXD" at 15.09,24.201 h1 r90
  text "RST" at 16.118,24.201 h1 r90
  text "3V3" at 16.117,21.686 h1 r90
  text "RXD" at 15.113,21.533 h1 r90
  text "BOOT" at 14.085,20.878 h1 r90
  text "3V3" at 14.04,14.617 h1
  text "." at -17.661,13.303 h1
  text "SCL" at 14.08,13.136 h1
  text "SDA" at 13.872,11.653 h1
  text "GND" at 13.761,10.172 h1
  text "GND" at 17.317,6.87 h1
  text "1WIRE" at 16.275,4.318 h1
  text "3V3" at 17.596,1.79 h1
  text "RESET" at 17.896,-7.482 h1
  text "SasaKaranovic.com" at 10.439,-12.044 h1.5
  text "Filament DryBox" at 11.348,-13.595 h1.5
  text ".Layer_Name" at 34.9,-22.159 h1
  text "GND" at -13.899,-26.15 h1
  text "5V PWM FAN" at 8.925,-26.15 h1
  text "VIN+" at -16.865,-26.161 h1
  text "HEATER" at -9.412,-26.162 h1
Bottom Overlay:
  drawing of 9 lines, arcs and shapes, not listed
  text "Filament DryBox" at 5.692,-19.014 h1.5
  text "SasaKaranovic.com" at 6.655,-20.76 h1.5
  text "2021-Dec" at 3.259,-22.484 h1.5
  text "Rev1" at 1.616,-24.19 h1.5
  text ".Layer_Name" at 34.9,-36.355 h1
Top Paste:
  text ".Layer_Name" at 34.9,-24.225 h1
Bottom Paste:
  text ".Layer_Name" at 34.9,-34.268 h1
Top Solder:
  text ".Layer_Name" at 34.9,-26.301 h1
Bottom Solder:
  text ".Layer_Name" at 34.9,-32.368 h1
Mechanical 13:
  lines w0.1: -18.669,13.271 -17.907,13.271 -17.907,12.636
  text "PIN1" at -17.734,12.774 h1
Drill Drawing:
  drawing of 251 lines, arcs and shapes, not listed
  text "Layer" at 54.752,33.782 h1.52
  text "Name" at 65.163,33.782 h1.52
  text "Material" at 88.779,33.782 h1.52
  text "Thickness" at 110.617,33.782 h1.52
  text "Constant" at 127.123,33.782 h1.52
  text "Board Layer Stack" at 141.597,33.782 h1.52
  text "Top Overlay" at 65.163,30.734 h1.52
  text "Top Solder" at 65.163,27.686 h1.52
  text "Solder Resist" at 88.779,27.686 h1.52
  text "0.010mm" at 110.617,27.686 h1.52
  text "3.5" at 127.123,27.686 h1.52
  text "1" at 54.752,24.638 h1.52
  text "Top Layer" at 65.163,24.638 h1.52
  text "0.036mm" at 110.617,24.638 h1.52
  text "Dielectric 1" at 65.163,21.59 h1.52
  text "FR-4" at 88.779,21.59 h1.52
  text "0.320mm" at 110.617,21.59 h1.52
  text "4.8" at 127.123,21.59 h1.52
  text "2" at 54.752,18.542 h1.52
  text "Bottom Layer" at 65.163,18.542 h1.52
  text "0.036mm" at 110.617,18.542 h1.52
  text "Bottom Solder" at 65.163,15.494 h1.52
  text "Solder Resist" at 88.779,15.494 h1.52
  text "0.010mm" at 110.617,15.494 h1.52
  text "3.5" at 127.123,15.494 h1.52
  text "Bottom Overlay" at 65.163,12.446 h1.52
  text "Symbol" at 55.447,7.838 h1.83
  text "Count" at 68.296,7.838 h1.83
  text "Hole Size" at 82.008,7.838 h1.83
  text "Plated" at 110.448,7.838 h1.83
  text "Hole Type" at 123.297,7.838 h1.83
  text "Via/Pad" at 141.936,7.838 h1.83
  text "Pad Shape" at 156.918,7.838 h1.83
  text "34" at 68.296,4.028 h1.52
  text "0.400mm (15.75mil)" at 82.008,4.028 h1.52
  text "PTH" at 110.448,4.028 h1.52
  text "Round" at 123.297,4.028 h1.52
  text "Via" at 141.936,4.028 h1.52
  text "Rounded" at 156.918,4.028 h1.52
  text "6" at 68.296,0.218 h1.52
  text "0.600mm (23.62mil)" at 82.008,0.218 h1.52
  text "PTH" at 110.448,0.218 h1.52
  text "Round" at 123.297,0.218 h1.52
  text "Via" at 141.936,0.218 h1.52
  text "Rounded" at 156.918,0.218 h1.52
  text "2" at 68.296,-3.592 h1.52
  text "0.762mm (30.00mil)" at 82.008,-3.592 h1.52
  text "PTH" at 110.448,-3.592 h1.52
  text "Round" at 123.297,-3.592 h1.52
  text "Pad" at 141.936,-3.592 h1.52
  text "Rounded" at 156.918,-3.592 h1.52
  text "4" at 68.296,-7.402 h1.52
  text "0.800mm (31.50mil)" at 82.008,-7.402 h1.52
  text "PTH" at 110.448,-7.402 h1.52
  text "Round" at 123.297,-7.402 h1.52
  text "Pad" at 141.936,-7.402 h1.52
  text "(Mixed)" at 156.918,-7.402 h1.52
  text "25" at 68.296,-11.212 h1.52
  text "0.900mm (35.43mil)" at 82.008,-11.212 h1.52
  text "PTH" at 110.448,-11.212 h1.52
  text "Round" at 123.297,-11.212 h1.52
  text "Pad" at 141.936,-11.212 h1.52
  text "(Mixed)" at 156.918,-11.212 h1.52
  text "4" at 68.296,-15.022 h1.52
  text "3.000mm (118.11mil)" at 82.008,-15.022 h1.52
  text "NPTH" at 110.448,-15.022 h1.52
  text "Round" at 123.297,-15.022 h1.52
  text "Pad" at 141.936,-15.022 h1.52
  text "Rounded" at 156.918,-15.022 h1.52
  text "75 Total" at 68.296,-18.832 h1.52
  text ".Layer_Name" at 34.9,-38.433 h1

## Dimensions
22.2,-26.797 to 22.2,28.746 on Drill Drawing
-24.2,-24.797 to 24.2,-24.797 on Drill Drawing

## Text inside footprints (layer, text, board x,y; h text height)
C3: Top Overlay "-" at 19.456,-20.599 h0.8; Top Overlay "+" at 21.311,-20.574 h0.8
C10: Top Overlay "+" at -10.312,-19.939 h0.8; Top Overlay "-" at -12.167,-19.964 h0.8
U1: Top Overlay "ANTENNA" at -7.964,25.281 h1